# Altium PCB MB1134.PcbDoc (part 2 of 2)
Units mm, origin at the board's own origin, x right, y up, seen from the top; angles counter-clockwise.
Board outline 53.34 x 88.9 mm, 2 copper layers (Top Layer, Bottom Layer), stack 1.571 mm thick; 105 components, 124 nets, 401 pads, 201 vias.
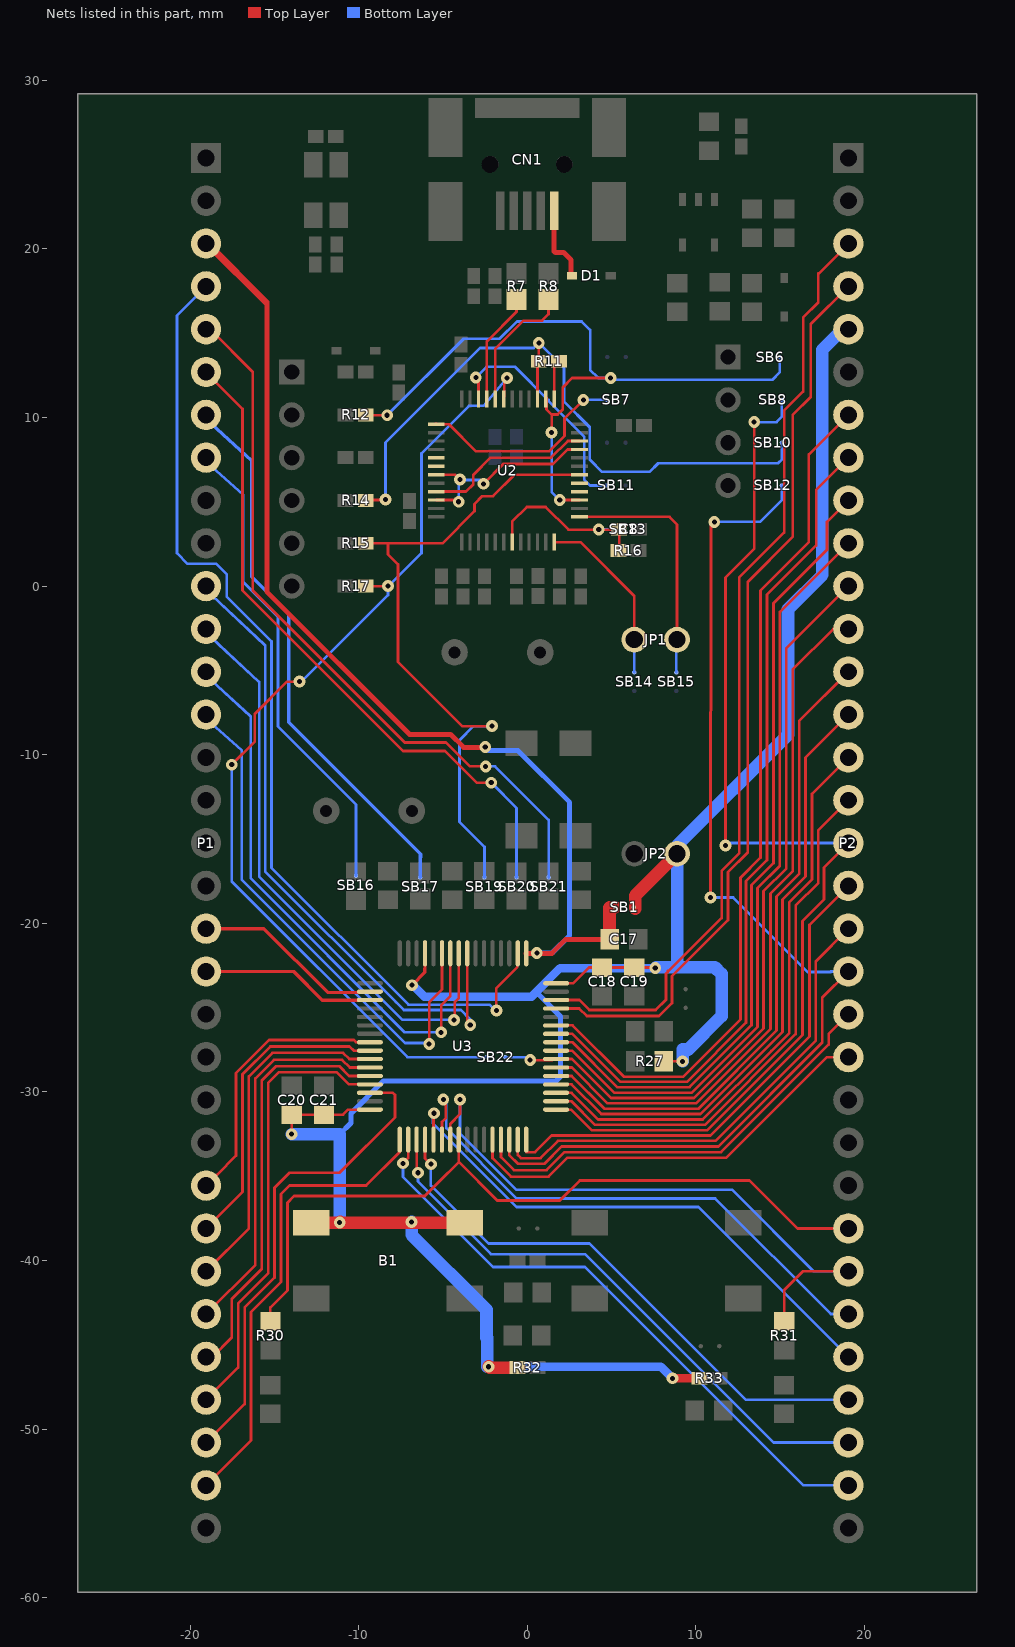
[diagram p2: the nets of this part, all layers, seen from the top]

## Via types
v1: diameter 0.7, hole 0.3, Top Layer to Bottom Layer, 200 vias
v2: diameter 0.6, hole 0.3, Top Layer to Bottom Layer, 1 vias

## Nets (pads, with @x,y where several pads share a name; then routed paths per layer and width w, separated by ;. In a path a pad name is that pad's centre, name@x,y a point inside that pad or via, vN(x,y) a via of type N, cw(c..) or ccw(c..) an arc to the next point about the centre after c; other vN are vias at no path point) (continued)
PA11: P2.22 U3.44 | length 25.6
  Top Layer w0.16: U3.44@-2.06,-32.83 -2.06,-33.932 -0.965,-35.027 1.27,-35.027 2.392,-33.905 11.811,-33.905 17.776,-27.94 P2.22@19.05,-27.94
PA12: P2.21 U3.45 | length 26.2
  Top Layer w0.16: U3.45@-1.56,-32.83 -1.56,-33.873 -0.787,-34.646 1.143,-34.646 2.21,-33.579 11.506,-33.579 17.882,-27.203 17.882,-26.568 P2.21@19.05,-25.4
PA13: P2.20 SB12.1 U3.46 | length 65.3
  Top Layer w0.16: U3.46@-1.06,-32.83 -1.06,-33.763 -0.559,-34.265 1.016,-34.265 2.045,-33.236 11.341,-33.236 17.501,-27.076 17.501,-24.409 P2.20@19.05,-22.86 ; v1(10.871,-18.466) 10.897,3.607 v1(11.1,3.81)
  Bottom Layer w0.16: v1(10.871,-18.466) 12.217,-18.466 16.637,-22.885 18.009,-22.885 ; v1(11.1,3.81) 13.818,3.81 15.105,5.097 SB12.1@15.105,5.969 ; 18.009,-22.86 P2.20@19.05,-22.86
PA14: P2.17 SB8.1 U3.49 | length 66
  Top Layer w0.16: U3.49@1.715,-31.055 2.607,-31.055 3.822,-32.27 10.687,-32.27 16.332,-26.626 16.332,-19.863 17.602,-18.593 17.602,-16.688 P2.17@19.05,-15.24 ; v1(11.76,-15.392) 11.76,0.508 13.462,2.21 v1(13.462,9.728)
  Bottom Layer w0.16: v1(11.76,-15.392) 11.913,-15.24 P2.17@19.05,-15.24 ; v1@13.462,9.652 v1(13.462,9.728) 14.783,9.728 15.105,10.05 SB8.1@15.105,11.049
PA15: P2.16 U3.50 | length 32.2
  Top Layer w0.16: U3.50@1.715,-30.555 2.615,-30.555 4.013,-31.953 10.552,-31.953 15.926,-26.58 15.926,-18.948 17.272,-17.602 17.272,-14.478 P2.16@19.05,-12.7
PB0: P1.27 U3.26 | length 20.5
  Top Layer w0.16: P1.27@-19.05,-40.64 -16.51,-38.1 -16.51,-29.083 -15.113,-27.686 -10.922,-27.686 -10.553,-28.055 U3.26@-9.335,-28.055
PB1: P1.28 U3.27 | length 22.6
  Top Layer w0.16: P1.28@-19.05,-43.18 -16.129,-40.259 -16.129,-29.21 -15.019,-28.1 -10.979,-28.1 -10.524,-28.555 U3.27@-9.335,-28.555
PB2: P1.29 U3.28 | length 25
  Top Layer w0.16: P1.29@-19.05,-45.72 -18.669,-45.72 -17.526,-44.577 -17.526,-42.291 -15.748,-40.513 -15.748,-29.337 -14.891,-28.48 -11.144,-28.48 -10.569,-29.055 U3.28@-9.335,-29.055
PB3: P2.11 SB22.2 U3.55 | length 46.1
  Top Layer w0.16: v1(0.178,-28.118) U3.55@1.473,-28.118 ; U3.55@1.715,-28.055 2.655,-28.055 4.965,-30.365 9.894,-30.365 14.021,-26.238 14.021,-18.085 15.367,-16.739 15.367,-3.683 P2.11@19.05,0
  Bottom Layer w0.16: SB22.2@-1.305,-27.94 0,-27.94 v1(0.178,-28.118)
PB4: P2.10 U3.56 | length 45.5
  Top Layer w0.16: U3.56@1.715,-27.555 2.663,-27.555 5.156,-30.048 9.765,-30.048 13.665,-26.148 13.665,-17.907 14.986,-16.586 14.986,-1.524 P2.10@19.05,2.54
PB5: P2.9 U3.57 | length 47.7
  Top Layer w0.16: U3.57@1.715,-27.055 2.671,-27.055 5.334,-29.718 9.636,-29.718 13.31,-26.045 13.31,-17.729 14.605,-16.434 14.605,-1.016 17.78,2.159 17.78,3.81 P2.9@19.05,5.08
PB6: P2.8 U3.58 | length 49.9
  Top Layer w0.16: U3.58@1.715,-26.555 2.679,-26.555 5.531,-29.407 9.468,-29.407 12.978,-25.896 12.978,-17.502 14.224,-16.256 14.224,-0.508 17.139,2.407 17.139,5.709 P2.8@19.05,7.62
PB7: P2.7 U3.59 | length 52.1
  Top Layer w0.16: U3.59@1.715,-26.055 2.687,-26.055 5.727,-29.095 9.259,-29.095 12.649,-25.705 12.649,-17.297 13.843,-16.104 13.843,-0.254 16.707,2.61 16.707,7.817 P2.7@19.05,10.16
PB8: P2.4 U3.61 | length 54.2
  Top Layer w0.16: U3.61@1.715,-25.055 3.084,-25.055 3.534,-25.505 7.82,-25.505 8.585,-24.74 8.585,-23.139 11.913,-19.812 11.913,-16.967 13.081,-15.799 13.081,0.254 15.748,2.921 15.748,10.16 16.818,11.23 16.818,15.548 P2.4@19.05,17.78
PB9: P2.3 U3.62 | length 56.5
  Top Layer w0.16: U3.62@1.715,-24.555 3.092,-24.555 3.683,-25.146 7.62,-25.146 8.23,-24.536 8.23,-22.987 8.331,-22.885 ; 8.331,-22.809 8.331,-22.885 ; 17.272,18.542 17.272,18.517 ; P2.3@19.05,20.32 19.05,20.295 17.272,18.517 ; 8.331,-22.885 11.532,-19.685 11.532,-16.891 12.573,-15.85 12.573,0.508 15.24,3.175 15.24,10.414 16.366,11.54 16.366,15.934 17.272,16.84 17.272,18.517
PB10: P1.30 U3.29 | length 27.8
  Top Layer w0.16: P1.30@-19.304,-48.26 -19.144,-48.383 P1.30@-18.64,-48.769 ; P1.30@-19.05,-48.26 -17.145,-46.355 -17.145,-42.545 -15.367,-40.767 -15.367,-29.464 -14.732,-28.829 -11.303,-28.829 -10.577,-29.555 U3.29@-9.335,-29.555
PB11: P1.31 U3.30 | length 28.5
  Top Layer w0.16: P1.31@-19.05,-50.8 -16.764,-48.514 -16.764,-42.799 -14.986,-41.021 -14.986,-35.687 -14.097,-34.798 -11.125,-34.798 -7.849,-31.521 -7.849,-30.175 -7.969,-30.055 U3.30@-9.335,-30.055
PB12: P1.32 U3.33 | length 27.9
  Top Layer w0.16: P1.32@-19.05,-53.34 -16.383,-50.673 -16.383,-43.053 -14.605,-41.275 -14.605,-36.068 -14.097,-35.56 -9.55,-35.56 -7.56,-33.57 U3.33@-7.56,-32.83
PB13: P2.32 U3.34 | length 36.3
  Top Layer w0.16: v1(-7.366,-34.238) -7.06,-33.932 U3.34@-7.06,-32.83
  Bottom Layer w0.16: v1(-7.366,-34.238) -7.366,-35.052 -2.032,-40.386 3.429,-40.386 16.383,-53.34 P2.32@19.05,-53.34
PB14: P2.31 U3.35 | length 34.5
  Top Layer w0.16: U3.35@-6.56,-32.83 -6.56,-34.715 v1(-6.477,-34.798)
  Bottom Layer w0.16: v1(-6.477,-34.798) -6.477,-35.306 -2.159,-39.624 3.429,-39.624 14.605,-50.8 v1(19.05,-50.8)
PB15: P2.30 U3.36 | length 32.9
  Top Layer w0.16: U3.36@-6.06,-32.83 -6.06,-33.945 v1(-5.715,-34.29)
  Bottom Layer w0.16: v1(-5.715,-34.29) -5.715,-35.56 -2.286,-38.989 3.683,-38.989 12.954,-48.26 P2.30@19.05,-48.26
PC0: P1.11 U3.8 | length 39
  Top Layer w0.16: U3.8@-3.56,-21.78 -3.56,-25.853 v1(-3.378,-26.035)
  Bottom Layer w0.16: P1.11@-19.304,0 -19.168,-0.127 -18.74,-0.526 -15.545,-3.505 -15.545,-16.916 -7.785,-24.676 -7.315,-25.146 -3.937,-25.146 -3.378,-25.705 v1(-3.378,-26.035)
PC1: P1.12 U3.9 | length 35.3
  Top Layer w0.16: v1(-4.343,-25.73) -4.293,-25.679 -4.293,-24.663 -4.06,-24.431 U3.9@-4.06,-21.78
  Bottom Layer w0.16: P1.12@-19.304,-2.54 -19.167,-2.667 -18.736,-3.065 -15.9,-5.69 -15.9,-17.221 -7.391,-25.73 v1(-4.343,-25.73)
PC2: P1.13 U3.10 | length 33.5
  Top Layer w0.16: v1(-5.105,-26.467) -5.105,-24.867 -4.56,-24.321 U3.10@-4.56,-21.78
  Bottom Layer w0.16: P1.13@-19.304,-5.08 -19.165,-5.206 -18.729,-5.605 -16.408,-7.722 -16.408,-17.323 -7.264,-26.467 v1(-5.105,-26.467)
PC3: P1.14 U3.11 | length 31.7
  Top Layer w0.16: v1(-5.817,-27.153) -5.817,-24.689 -5.06,-23.932 U3.11@-5.06,-21.78
  Bottom Layer w0.16: P1.14@-19.304,-7.62 -19.163,-7.746 -18.717,-8.144 -16.942,-9.728 -16.942,-17.399 -7.239,-27.102 -5.867,-27.102 v1(-5.817,-27.153) ; P1.14@-19.05,-7.671 P1.14@-19.05,-7.62
PC4: P1.25 U3.24 | length 16.2
  Top Layer w0.16: P1.25@-19.05,-35.56 -18.412,-34.922 -17.272,-33.782 -17.272,-28.891 -15.305,-26.924 -10.287,-26.924 -10.156,-27.055 U3.24@-9.335,-27.055
PC5: P1.26 U3.25 | length 18.4
  Top Layer w0.16: P1.26@-19.05,-38.1 -16.891,-35.941 -16.891,-28.956 -15.24,-27.305 -10.541,-27.305 -10.291,-27.555 U3.25@-9.335,-27.555
PC6: P2.29 U3.37 | length 32.9
  Top Layer w0.16: U3.37@-5.56,-32.83 -5.56,-31.29 v1(-5.537,-31.267) ; P2.29@19.05,-45.72 P2.29@19.05,-45.288
  Bottom Layer w0.16: v1@-5.588,-31.318 -5.588,-31.877 -0.635,-36.83 10.16,-36.83 P2.29@19.05,-45.72
PC7: P2.28 U3.38 | length 32.7
  Top Layer w0.16: U3.38@-5.06,-32.83 -5.06,-31.781 -4.826,-31.547 -4.826,-30.607 v1(-4.978,-30.455)
  Bottom Layer w0.16: v1(-4.978,-30.455) -4.978,-30.48 -4.801,-30.658 -4.801,-32.156 -0.635,-36.322 11.151,-36.322 18.009,-43.18 P2.28@19.05,-43.18
PC8: P2.27 R31.2 U3.39 | length 37.2
  Top Layer w0.16: U3.39@-4.56,-32.83 -4.56,-31.89 -3.988,-31.318 v1(-3.988,-30.455) ; R31.2@15.245,-43.619 15.245,-41.753 16.358,-40.64 P2.27@19.05,-40.64
  Bottom Layer w0.16: v1(-3.988,-30.455) -3.988,-32.461 -0.635,-35.814 12.167,-35.814 16.993,-40.64 P2.27@19.05,-40.64
PC9: P2.26 R30.2 U3.40 | length 45.7
  Top Layer w0.16: R30.2@-15.235,-43.619 -15.235,-42.794 -14.224,-41.783 -14.224,-36.576 -13.826,-36.178 -6.079,-36.178 -4.699,-34.798 ; -4.695,-34.802 -4.06,-34.167 ; U3.40@-4.06,-32.83 -4.06,-34.167 ; P2.26@19.05,-38.1 16.027,-38.1 13.183,-35.255 3.124,-35.255 1.93,-36.449 -1.778,-36.449 -4.06,-34.167
PC10: P2.15 U3.51 | length 34.4
  Top Layer w0.16: U3.51@1.715,-30.055 2.623,-30.055 4.203,-31.635 10.409,-31.635 14.481,-27.563 15.545,-26.5 15.545,-18.745 16.891,-17.399 16.891,-12.319 P2.15@19.05,-10.16
PC11: P2.14 U3.52 | length 36.6
  Top Layer w0.16: U3.52@1.715,-29.555 2.631,-29.555 4.394,-31.318 10.273,-31.318 15.138,-26.453 15.138,-18.593 16.51,-17.221 16.51,-10.16 P2.14@19.05,-7.62
PC12: P2.13 U3.53 | length 38.8
  Top Layer w0.16: U3.53@1.715,-29.055 2.639,-29.055 4.584,-31 10.148,-31 14.783,-26.365 14.783,-18.415 16.129,-17.069 16.129,-8.001 P2.13@19.05,-5.08
PC13: P1.4 U3.2 | length 59.4
  Top Layer w0.16: v1(-1.829,-25.171) -1.829,-23.851 -0.584,-22.606 -0.584,-21.78 U3.2@-0.584,-21.666
  Bottom Layer w0.16: P1.4@-19.05,17.78 -20.777,16.053 -20.777,1.956 -20.142,1.321 -18.44,1.321 -17.831,0.711 -17.831,-0.61 -15.164,-3.277 -15.164,-16.713 -7.049,-24.828 -2.248,-24.828 -1.905,-25.171 v1(-1.829,-25.171)
PC14: P1.5 SB21.1 | length 43.4
  Top Layer w0.16: P1.5@-19.05,15.24 -18.821,15.24 -16.281,12.7 -16.281,-0.254 -7.264,-9.271 -4.826,-9.271 -3.404,-10.693 v1(-2.464,-10.693)
  Bottom Layer w0.16: v1(-2.464,-10.693) -1.905,-10.693 1.27,-13.868 SB21.1@1.27,-17.28
PC15: P1.6 SB20.1 | length 39.6
  Top Layer w0.16: P1.6@-19.05,12.7 -19.05,12.675 -16.891,10.516 -16.891,-0.254 -7.366,-9.779 -4.877,-9.779 -2.997,-11.659 v1(-2.134,-11.659)
  Bottom Layer w0.16: v1(-2.134,-11.659) -0.635,-13.157 SB20.1@-0.635,-17.28
PD2: P2.12 U3.54 | length 41.6
  Top Layer w0.16: U3.54@1.715,-28.555 2.647,-28.555 4.775,-30.683 10.019,-30.683 14.427,-26.275 14.427,-18.237 15.748,-16.916 15.748,-4.953 18.161,-2.54 P2.12@19.05,-2.54
PF0: P1.7 SB17.1 | length 33.1
  Bottom Layer w0.2: P1.7@-19.304,10.16 -19.166,10.034 -18.73,9.635 -16.332,7.442 -16.332,0.559 -14.148,-1.626 -14.148,-8.077 -6.35,-15.875 ; SB17.1@-6.35,-17.28 -6.35,-15.875 ; -6.299,-16.078 -6.299,-15.926 -6.35,-15.875
PF1: P1.8 SB16.2 | length 28.7
  Bottom Layer w0.16: P1.8@-19.304,7.62 -19.163,7.494 -18.72,7.096 -16.84,5.41 -16.84,0.229 -14.783,-1.829 -14.783,-8.331 -10.16,-12.954 SB16.2@-10.16,-17.18
PF4: P1.19 U3.18 | length 11.2
  Top Layer w0.2: P1.19@-19.304,-20.32 P1.19@-19.05,-20.32 -15.621,-20.32 -11.836,-24.105 U3.18@-9.627,-24.105
PF5: P1.20 U3.19 | length 10.7
  Top Layer w0.2: P1.20@-19.304,-22.86 P1.20@-19.05,-22.86 -13.843,-22.86 -12.148,-24.555 U3.19@-9.335,-24.555
PF6: P2.19 U3.47 | length 29
  Top Layer w0.16: U3.47@-0.56,-32.83 -0.56,-33.755 -0.381,-33.934 0.787,-33.934 1.816,-32.905 11.164,-32.905 17.12,-26.949 17.12,-22.25 P2.19@19.05,-20.32
PF7: P2.18 U3.48 | length 30.3
  Top Layer w0.16: U3.48@-0.06,-32.83 -0.06,-33.57 -0.051,-33.579 0.457,-33.579 1.448,-32.588 10.871,-32.588 15.596,-27.863 16.739,-26.721 16.739,-20.091 P2.18@19.05,-17.78
STLINK_RX: JP1.1 SB15.2 U2.13 | length 14.8
  Top Layer w0.16: U2.13@3.107,4.108 8.44,4.108 8.89,3.658 JP1.1@8.89,-3.175
  Bottom Layer w0.16: SB15.2@8.846,-5.115 8.846,-3.219 JP1.1@8.89,-3.175
STLINK_TX: JP1.2 SB14.2 U2.12 | length 10.6
  Top Layer w0.16: U2.12@1.607,2.608 3.158,2.608 6.35,-0.584 JP1.2@6.35,-3.175
  Bottom Layer w0.16: SB14.2@6.35,-5.115 JP1.2@6.35,-3.175
STM_JTCK: SB7.2 U2.37 | length 12.7
  Top Layer w0.16: U2.37@-5.436,9.627 -5.393,9.627 -5.374,9.627 U2.37@-5.393,9.608 -4.655,9.608 -3.04,7.993 1.287,7.993 2.21,8.915 2.21,9.931 v1(3.327,11.049)
  Bottom Layer w0.16: v1(3.327,11.049) SB7.2@4.734,11.049
STM_JTMS: SB11.2 U2.34 | length 13.8
  Top Layer w0.16: v1(-3.048,12.37) -2.893,12.215 U2.34@-2.893,11.108
  Bottom Layer w0.16: v1(-3.048,12.37) -2.413,13.005 -0.712,13.005 1.27,11.024 ; 1.27,11.049 1.27,11.024 ; SB11.2@4.734,5.969 3.734,5.969 3.378,6.325 3.378,8.865 1.27,10.973 1.27,11.024
STM_RST: C8.2 R16.1 SB13.2 U2.7 | length 11
  Top Layer w0.16: U2.7@-0.893,2.608 -0.893,3.831 -0.025,4.699 1.092,4.699 2.438,3.353 v1(4.242,3.353) 5.436,3.353 C8.2@5.461,3.353 ; C8.2@5.436,3.378 C8.2@5.461,3.353 ; R16.1@5.461,2.083 5.461,2.108 C8.2@5.461,3.353
  Bottom Layer w0.16: v1@4.267,3.378 SB13.2@5.42,3.378
SWIM: U2.22 U2.45 | length 10.1
  Top Layer w0.16: U2.45@-5.393,5.608 -3.632,5.608 -3.2,6.04 -3.2,6.604 -2.184,7.62 1.422,7.62 2.41,8.608 U2.22@3.107,8.608
SWIM_IN: U2.21 U2.43 U2.46 | length 12.6
  Top Layer w0.16: U2.46@-5.393,5.108 -4.092,5.108 -4.092,5.004 -4.092,4.879 v1(-4.064,5.004) ; U2.43@-5.393,6.608 U2.43@-5.385,6.608 ; U2.43@-5.385,6.604 -4.267,6.604 v1(-3.988,6.325) ; v1(-2.591,6.071) -1.422,7.239 1.524,7.239 2.393,8.108 U2.21@3.107,8.108
  Bottom Layer w0.16: v1(-4.064,5.004) -4.064,6.248 v1(-3.988,6.325) -3.785,6.299 -2.819,6.299 v1(-2.591,6.071)
SWIM_RST: U2.42
SWIM_RST_IN: U2.41
T_JTCK: R12.2 SB6.1 U2.15 U2.26 | length 43.6
  Top Layer w0.16: R12.2@-9.576,10.135 v1(-8.306,10.135) ; U2.26@1.107,11.108 U2.26@1.143,11.12 ; U2.26@1.143,11.176 U2.26@1.143,11.12 ; U2.26@1.159,11.125 U2.26@1.143,11.12 ; v1(1.448,9.119) 1.448,10.185 ; v1(1.93,5.105) U2.15@3.099,5.105 ; U2.15@3.048,5.107 3.099,5.107 U2.15@3.107,5.107 ; v1(4.953,12.344) 2.667,12.344 2.108,11.786 2.108,10.49 1.803,10.185 1.448,10.185 ; U2.26@1.143,11.12 1.143,11.108 1.143,10.49 1.448,10.185
  Bottom Layer w0.16: v1(-8.306,10.135) -3.765,14.675 -1.632,14.675 -0.61,15.697 3.226,15.697 3.734,15.189 3.734,12.827 4.191,12.37 4.216,12.37 ; v1(1.448,9.119) 1.448,5.588 v1(1.93,5.105) ; 4.216,12.344 v1(4.953,12.344) 5.055,12.243 14.538,12.243 14.978,12.683 SB6.1@14.978,13.589
T_JTDI: U2.17
T_JTDO: U2.16
T_JTMS: R11.2 R14.2 SB10.1 U2.27 | length 41.3
  Top Layer w0.16: R14.2@-9.652,5.105 -9.576,5.105 v1@-8.433,5.105 ; U2.27@0.607,11.108 0.607,11.885 ; U2.27@0.61,11.125 R11.2@0.61,13.259 ; R11.2@0.686,13.335 v1(0.686,14.427)
  Bottom Layer w0.16: v1(-8.407,5.131) -8.407,8.509 -2.794,14.122 0.381,14.122 v1(0.686,14.427) 2.184,12.929 2.184,10.947 3.708,9.423 3.708,7.518 4.445,6.782 7.264,6.782 7.772,7.29 14.884,7.29 15.105,7.51 SB10.1@15.105,8.509
T_NRST: R15.2 SB19.1 U2.18 | length 40.1
  Top Layer w0.16: R15.2@-9.576,2.54 -8.255,2.54 ; v1(-2.083,-8.306) -3.861,-8.306 -4.54,-7.626 -7.33,-4.837 -7.671,-4.496 -7.671,1.295 -8.255,1.88 -8.255,2.54 ; U2.18@3.107,6.608 -0.758,6.608 -2.032,5.334 -2.667,5.334 -3.124,4.877 -3.124,4.445 -5.029,2.54 -8.255,2.54
  Bottom Layer w0.16: SB19.1@-2.54,-17.28 -2.54,-15.469 -4.013,-13.995 -4.013,-9.144 -3.175,-8.306 v1(-2.083,-8.306)
T_SWDIO_IN: R11.1 U2.25 | length 2.4
  Top Layer w0.16: R11.1@1.575,13.03 R11.1@1.607,13.062 ; U2.25@1.607,11.108 R11.1@1.607,13.062 ; R11.1@1.88,13.335 R11.1@1.607,13.062
T_SWO: R17.2 SB22.1 U2.31 | length 59.5
  Top Layer w0.16: v1(-17.526,-10.592) -16.154,-9.22 -16.154,-7.569 -14.249,-5.664 v1(-13.513,-5.664) ; R17.2@-9.576,0 v1(-8.255,0) ; U2.31@-1.372,11.227 -1.372,12.167 v1(-1.194,12.344)
  Bottom Layer w0.16: v1(-17.526,-10.592) -17.526,-17.526 -7.112,-27.94 SB22.1@-2.405,-27.94 ; v1(-13.513,-5.664) -13.386,-5.664 -8.255,-0.533 v1@-8.255,-0.025 ; v1@-8.23,0 -6.274,1.956 -6.274,7.874 -3.454,10.693 -2.591,10.693 v1(-1.194,12.344)
U5V: CN1.1 D1.1 | length 3.7
  Top Layer w0.3: CN1.1@1.6,21.36 1.6,19.863 1.676,19.787 2.159,19.787 2.591,19.355 2.591,18.415 D1.1@2.591,18.364
USB_DM: R8.2 U2.32 | length 7.8
  Top Layer w0.16: U2.32@-1.893,11.108 -1.893,14.085 -1.253,14.725 -0.23,15.748 0.884,15.748 1.265,16.129 R8.2@1.265,16.949
USB_DP: R7.2 U2.33 | length 6.6
  Top Layer w0.16: U2.33@-2.393,11.108 -2.393,14.523 -0.64,16.276 R7.2@-0.64,16.949
VBAT: C17.2 P1.3 SB1.1 U3.1 | length 68.3
  Top Layer w0.3: v1(-2.489,-9.55) -2.489,-9.576 -2.502,-9.563 -3.772,-9.563 -4.547,-8.788 -6.985,-8.788 -15.443,-0.33 -15.443,16.713 ; U3.1@-0.06,-21.78 v1@0.559,-21.78 ; v1(0.571,-21.768) v1@0.559,-21.78 ; C17.2@4.884,-20.95 2.286,-20.95 2.286,-20.955 1.461,-21.78 0.571,-21.78 v1@0.559,-21.78 ; -15.443,16.713 P1.3@-19.05,20.32 -18.898,20.32 -15.443,16.866 -15.443,16.713
  Top Layer w0.75: C17.2@4.884,-20.95 4.884,-19.069 4.902,-19.05 SB1.1@5.215,-19.05
  Bottom Layer w0.3: v1(-2.489,-9.55) -2.286,-9.754 -0.559,-9.754 2.515,-12.827 2.515,-20.726 1.473,-21.768 v1(0.571,-21.768)
VDD: B1.1 B1.2 C18.1 C19.1 C20.1 C21.1 JP2.2 P2.5 R27.1 R32.2 R33.2 SB1.2 U3.13 U3.32 U3.64 | length 150.3
  Top Layer w0.16: v1(-13.97,-32.512) C20.1@-13.965,-31.349 -10.927,-31.349 -10.633,-31.055 U3.32@-9.335,-31.055 ; U3.64@1.715,-23.555 2.734,-23.555 3.663,-22.626 v1@7.564,-22.626 ; R27.1@8.108,-28.189 v1(9.215,-28.189)
  Top Layer w0.2: v1(-6.833,-23.673) -6.071,-22.911 -6.071,-22.708 ; -6.06,-22.708 U3.13@-6.06,-21.78
  Top Layer w0.5: v1(8.611,-46.99) R33.2@10.211,-46.99
  Top Layer w0.75: B1.1@-12.667,-37.617 B1.1@-12.805,-37.755 B1.2@-3.705,-37.755 B1.2@-3.843,-37.617 ; v1@-11.136,-37.755 v1@-11.1,-37.719 ; v1@-11.135,-37.744 v1(-11.125,-37.744) ; v1@-2.273,-46.291 -2.21,-46.355 R32.2@-0.584,-46.355 ; SB1.2@6.401,-19.126 6.401,-18.364 JP2.2@8.89,-15.875
  Bottom Layer w0.305: -11.125,-32.512 -10.454,-31.84 -10.454,-31.282 -8.534,-29.362 1.702,-29.362 1.981,-29.083 1.981,-25.527 0.533,-24.079
  Bottom Layer w0.5: v1@-6.782,-23.673 -6.109,-24.346 0.267,-24.346 1.956,-22.657 v1(7.595,-22.657) ; v1(-2.286,-46.304) 7.925,-46.304 v1(8.611,-46.99)
  Bottom Layer w0.75: v1(-13.97,-32.512) -11.125,-32.512 v1(-11.125,-37.744) ; v1(-6.858,-37.719) -6.858,-38.481 -2.413,-42.926 -2.413,-44.577 ; v1@-2.362,-46.304 -2.362,-44.577 ; v1@7.645,-22.606 8.707,-22.606 8.89,-22.423 ; JP2.2@8.89,-15.875 8.89,-22.606 11.125,-22.606 11.532,-23.012 11.532,-25.502 9.55,-27.483 9.22,-27.483 ; JP2.2@8.89,-15.392 15.469,-8.814 15.469,-1.372 17.505,0.665 17.505,14.025 18.72,15.24 P2.5@19.05,15.24 ; v1(9.215,-28.189) 9.215,-27.483
pads on no net: CN1.6 CN1.7 U2.4 U2.11 U2.14 U2.19 U2.28 U2.38 U2.39 U2.40 X3.2 X3.3

## Polygon pours and split planes (outlines as drawn)
GND on Top Layer "GND" (solid, remove dead copper, pour order 1000): -25.908,-58.928 25.908,-58.928 25.908,28.448 -25.908,28.448
GND on Bottom Layer "GND" (solid, remove dead copper, pour order 1001): -25.908,28.448 25.908,28.448 25.908,-58.928 -25.908,-58.928

## Other copper
Top Layer:
  text ".Layer_Name" at -58.6,-144.2 h7
Bottom Layer:
  text ".Layer_Name" at -58.6,-144.2 h7

## Silkscreen, mask and mechanical layers (free items; w line width, h text height)
Top Overlay:
  drawing of 244 lines, arcs and shapes, not listed
  text "PWR" at 6.985,26.162 h1
  text "3V" at -24.384,24.892 h1
  text "5V" at 20.955,24.892 h1
  text "COM" at -17.018,23.114 h1
  text "GND" at 20.955,22.428 h1
  text "GND" at -24.384,22.352 h1
  text "PB9" at 20.955,19.888 h1
  text "VDD" at -24.384,19.812 h1
  text "PB8" at 20.955,17.348 h1
  text "PC13" at -24.384,17.272 h1
  text "VDD" at 20.955,14.808 h1
  text "PC14" at -24.384,14.732 h1
  text "BOOT0" at 20.955,12.268 h1
  text "PC15" at -24.384,12.192 h1
  text "PB7" at 20.955,9.728 h1
  text "PF0" at -24.384,9.652 h1
  text "PB6" at 20.955,7.188 h1
  text "PF1" at -24.384,7.112 h1
  text "ST-LINK" at 8.89,6.604 h1.2 r90
  text "DISCOVERY" at 17.018,5.842 h1.2 r90
  text "PB5" at 20.955,4.648 h1
  text "GND" at -24.384,4.572 h1
  text "SWD" at -15.748,4.318 h1.5 r90
  text "PB4" at 20.955,2.108 h1
  text "NRST" at -24.384,2.032 h1
  text "PB3" at 20.955,-0.432 h1
  text "PC0" at -24.384,-0.508 h1
  text "PD2" at 20.955,-2.972 h1
  text "PC1" at -24.384,-3.048 h1
  text "PC12" at 20.955,-5.512 h1
  text "PC2" at -24.384,-5.588 h1
  text "TX" at 5.588,-5.842 h1
  text "RX" at 8.128,-5.842 h1
  text "www.st.com/stm32f0-discovery" at -15.545,-7.62 h1.5
  text "PC11" at 20.955,-8.052 h1
  text "PC3" at -24.384,-8.128 h1
  text "PC10" at 20.955,-10.592 h1
  text "PA0" at -24.384,-10.668 h1
  text "PA15" at 20.955,-13.132 h1
  text "PA1" at -24.384,-13.208 h1
  text "Idd" at 6.858,-13.97 h1
  text "PA14" at 20.955,-15.672 h1
  text "PA2" at -24.384,-15.748 h1
  text "PF7" at 20.955,-18.212 h1
  text "PA3" at -24.384,-18.288 h1
  text "PF6" at 20.955,-20.752 h1
  text "PF4" at -24.384,-20.828 h1
  text "PA13" at 20.955,-23.292 h1
  text "PF5" at -24.384,-23.368 h1
  text "PA12" at 20.955,-25.832 h1
  text "PA4" at -24.384,-25.908 h1
  text "PA11" at 20.955,-28.372 h1
  text "PA5" at -24.384,-28.448 h1
  text "PA10" at 20.955,-30.912 h1
  text "PA6" at -24.384,-30.988 h1
  text "PA9" at 20.955,-33.452 h1
  text "PA7" at -24.384,-33.528 h1
  text "PA8" at 20.955,-35.992 h1
  text "PC4" at -24.384,-36.068 h1
  text "PC9" at 20.955,-38.532 h1
  text "PC5" at -24.384,-38.608 h1
  text "PC8" at 20.955,-41.072 h1
  text "PB0" at -24.384,-41.148 h1
  text "PC7" at 20.955,-43.612 h1
  text "PB1" at -24.384,-43.688 h1
  text "USER" at -11.176,-45.466 h1.5
  text "RESET" at 3.175,-45.593 h1.5
  text "PC6" at 20.955,-46.152 h1
  text "PB2" at -24.384,-46.228 h1
  text "PB10" at -24.384,-48.768 h1
  text "PB15" at 20.955,-48.768 h1
  text "PB11" at -24.384,-51.308 h1
  text "PC9" at -16.637,-51.308 h1
  text "PB14" at 20.955,-51.308 h1
  text "PC8" at 13.843,-51.562 h1
  text "PB12" at -24.384,-53.848 h1
  text "PB13" at 20.955,-53.848 h1
  text "MB1134 rev A" at -1.27,-54.61 h1.5
  text "GND" at -24.384,-56.388 h1
  text "GND" at 20.955,-56.388 h1
  text "STM32F0308-DISCO" at -3.81,-57.15 h1.5
  text ".Layer_Name" at -58.6,-144.2 h7
Bottom Overlay:
  circle w0.2: c3.251,-42.634 r2.881
  circle w0.2: c-7.984,-42.68 r2.867
  lines w0.2: -2.95,-36.654 17.05,-36.654 17.05,-30.654 -2.95,-30.654 -2.95,-36.654
  lines w0.254: 7.212,4.218 7.366,4.318 ; 7.212,14.378 7.366,14.478 ; 7.366,4.318 3.556,4.318 3.556,14.478 7.366,14.478 ; 7.366,4.318 7.366,14.478 ; 12.954,3.81 12.954,14.478 16.002,14.478 16.002,3.81 12.954,3.81
  lines w0.508: -9.585,-41.436 cw(c-9.47,-42.591) -9.583,-43.747 ; -9.406,-42.502 -8.517,-42.502 ; -7.586,-43.723 ccw(c-7.472,-42.567) -7.586,-41.411
  text "DEFAULT" at 16.332,6.096 h1.2 r270
  text "RESERVED" at 1.778,5.588 h1.3 r270
  text "SN" at 6.096,-34.29 h1.27
  text "RoHS" at 5.78,-43.217 h1.4
  text ".Layer_Name" at 46.101,-144.145 h7
Top Paste:
  text ".Layer_Name" at -57.6,-143.5 h7
Bottom Paste:
  text ".Layer_Name" at -57.6,-143.5 h7
Top Solder:
  text ".Layer_Name" at -57.6,-143.5 h7
Bottom Solder:
  text ".Layer_Name" at -57.6,-143.5 h7
CONTOUR:
  the board outline again, w0.15
  text "MB1134" at -25.4,30.988 h1.52
CARTOUCHE FT:
  lines w0.203: -59.17,-166.88 50.05,-166.88 ; -59.17,-157.99 50.05,-157.99
  lines w0.508: -96,-174.5 -96,-133.86 94.5,-133.86 ; -93.46,-159.26 -62.98,-159.26 ; -93.46,-147.83 -62.98,-147.83 ; -105.5,-174.5 94.5,-174.5 94.5,112.5 -105.5,112.5 -105.5,-174.5 ; -93.46,-171.96 -62.98,-171.96 -62.98,-136.4 -93.46,-136.4 -93.46,-171.96 ; -60.44,-171.96 51.32,-171.96 51.32,-149.1 -60.44,-149.1 -60.44,-171.96 ; -60.44,-146.56 51.32,-146.56 51.32,-136.4 -60.44,-136.4 -60.44,-146.56 ; 53.86,-171.96 91.96,-171.96 91.96,-136.4 53.86,-136.4 53.86,-171.96
  text "DATE:" at -92.558,-143.863 h4
  text ".Print_Date" at -81.058,-143.863 h4
  text ".Print_Scale" at -92.322,-156.644 h4
  text "STM32F0-DISCOVERY" at -58,-157 h7
  text "MB1134B" at -58,-166 h7
  text "S.M.E.E." at -92.71,-167.894 h7
CARTOUCHE FB (Mech16):
  lines w0.203: -61.05,-166.88 48.17,-166.88 ; -61.05,-157.99 48.17,-157.99
  lines w0.508: -105.5,-133.86 85,-133.86 85,-174.5 ; 51.98,-159.26 82.46,-159.26 ; 51.98,-147.83 82.46,-147.83 ; -105.5,-174.5 -105.5,112.5 94.5,112.5 94.5,-174.5 -105.5,-174.5 ; -102.96,-171.96 -64.86,-171.96 -64.86,-136.4 -102.96,-136.4 -102.96,-171.96 ; -62.32,-171.96 -62.32,-149.1 49.44,-149.1 49.44,-171.96 -62.32,-171.96 ; -62.32,-146.56 -62.32,-136.4 49.44,-136.4 49.44,-146.56 -62.32,-146.56 ; 51.98,-171.96 82.46,-171.96 82.46,-136.4 51.98,-136.4 51.98,-171.96
  text ".Print_Date" at 70.058,-143.863 h4
  text "DATE:" at 81.558,-143.863 h4
  text ".Print_Scale" at 81.322,-156.644 h4
  text "STM32F0-DISCOVERY" at 47,-157 h7
  text "MB1134B" at 47,-166 h7
  text "S.M.E.E." at 81.03,-167.785 h7
Drill Drawing:
  region: -22.207,-90.108 -21.868,-90.108 -21.868,-94.299 -22.207,-94.299
  region: -96.345,-89.431 -95.666,-89.431 -95.666,-129.523 -96.345,-129.523
  region: -44.784,-90.108 -44.444,-90.108 -44.444,-128.846 -44.784,-128.846
  region: -22.207,-98.66 -21.868,-98.66 -21.868,-128.846 -22.207,-128.846
  region: 0.199,-90.108 0.878,-90.108 0.878,-129.523 0.199,-129.523
  region: -95.666,-89.431 0.878,-89.431 0.878,-90.108 -95.666,-90.108
  region: -95.666,-93.961 0.199,-93.961 0.199,-94.299 -95.666,-94.299
  region: -95.666,-98.321 0.199,-98.321 0.199,-98.66 -95.666,-98.66
  region: -95.666,-102.682 0.199,-102.682 0.199,-103.021 -95.666,-103.021
  region: -95.666,-107.043 0.199,-107.043 0.199,-107.381 -95.666,-107.381
  region: -95.666,-111.403 0.199,-111.403 0.199,-111.742 -95.666,-111.742
  region: -95.666,-115.764 0.199,-115.764 0.199,-116.103 -95.666,-116.103
  region: -95.666,-120.125 0.199,-120.125 0.199,-120.463 -95.666,-120.463
  region: -95.666,-124.485 0.199,-124.485 0.199,-124.824 -95.666,-124.824
  region: -95.666,-128.846 0.878,-128.846 0.878,-129.523 -95.666,-129.523
  lines w0.042: -95.666,-124.485 0.199,-124.485 ; -95.666,-120.125 0.199,-120.125 ; -95.666,-115.764 0.199,-115.764 ; -95.666,-111.403 0.199,-111.403 ; -95.666,-107.043 0.199,-107.043 ; -95.666,-102.682 0.199,-102.682 ; -95.666,-98.321 0.199,-98.321 ; -95.666,-93.961 0.199,-93.961 ; -44.784,-128.846 -44.784,-90.108 ; -22.207,-128.846 -22.207,-98.66 ; -22.207,-94.299 -22.207,-90.108
  lines w0.15: 10.033,-101.356 88.138,-101.356 ; 10.033,-98.746 88.138,-98.746 ; 8.509,-122.34 ccw(c9.359,-122.34) 9.359,-123.19 88.812,-123.19 ccw(c88.812,-122.34) 89.662,-122.34 89.662,-91.401 ccw(c88.812,-91.401) 88.812,-90.551 9.359,-90.551 ccw(c9.359,-91.401) 8.509,-91.401 8.509,-122.34
  text ".Legend" at -93.345,46.609 h2.5
  text "F" at -95.326,-93.119 h3.5
  text "i" at -93.167,-93.119 h3.5
  text "c" at -92.405,-93.119 h3.5
  text "h" at -90.627,-93.119 h3.5
  text "e" at -88.679,-93.119 h3.5
  text "T" at -85.758,-93.119 h3.5
  text "e" at -83.557,-93.119 h3.5
  text "c" at -81.609,-93.119 h3.5
  text "h" at -79.831,-93.119 h3.5
  text "n" at -77.884,-93.119 h3.5
  text "i" at -75.936,-93.119 h3.5
  text "q" at -75.174,-93.119 h3.5
  text "u" at -73.227,-93.119 h3.5
  text "e" at -71.279,-93.119 h3.5
  text "c" at -68.358,-93.119 h3.5
  text "u" at -66.58,-93.119 h3.5
  text "i" at -64.632,-93.119 h3.5
  text "v" at -63.87,-93.119 h3.5
  text "r" at -62.134,-93.119 h3.5
  text "e" at -60.949,-93.119 h3.5
  text "Layer Stack Up Detail for: MB1134.PcbDoc" at 10.033,-96.093 h1.9
  text "C" at -95.326,-97.479 h3.5
  text "o" at -92.786,-97.479 h3.5
  text "t" at -90.839,-97.479 h3.5
  text "e" at -89.865,-97.479 h3.5
  text "m" at -86.944,-97.479 h3.5
  text "a" at -83.938,-97.479 h3.5
  text "x" at -81.99,-97.479 h3.5
  text "i" at -80.212,-97.479 h3.5
  text "m" at -79.45,-97.479 h3.5
  text "u" at -76.444,-97.479 h3.5
  text "m" at -74.497,-97.479 h3.5
  text "53.34mm x 88.9mm" at -43.935,-97.479 h3.5
  text "Layer" at 10.033,-99.721 h0.6
  text "Gerber" at 26.746,-99.721 h0.6
  text "Copper" at 35.151,-99.721 h0.6
  text "Dielectric" at 44.537,-99.721 h0.6
  text "Dielectric" at 54.342,-99.721 h0.6
  text "Dielectric" at 66.806,-99.721 h0.6
  text "Dielectric" at 76.611,-99.721 h0.6
  text "Name" at 10.033,-100.921 h0.6
  text "Document" at 26.746,-100.921 h0.6
  text "Thickness" at 35.151,-100.921 h0.6
  text "Height" at 44.537,-100.921 h0.6
  text "Material" at 54.342,-100.921 h0.6
  text "Constant" at 66.806,-100.921 h0.6
  text "Type" at 76.611,-100.921 h0.6
  text "N" at -95.326,-101.84 h3.5
  text "b" at -92.786,-101.84 h3.5
  text "r" at -90.839,-101.84 h3.5
  text "e" at -89.653,-101.84 h3.5
  text "d" at -86.732,-101.84 h3.5
  text "e" at -84.784,-101.84 h3.5
  text "c" at -81.863,-101.84 h3.5
  text "o" at -80.085,-101.84 h3.5
  text "u" at -78.138,-101.84 h3.5
  text "c" at -76.19,-101.84 h3.5
  text "h" at -74.412,-101.84 h3.5
  text "e" at -72.464,-101.84 h3.5
  text "s" at -70.517,-101.84 h3.5
  text "2" at -34.132,-101.84 h3.5
  text "Top Solder Mask" at 10.033,-103.516 h0.85
  text "(.GTS)" at 26.746,-103.516 h0.85
  text "0.0102mm" at 44.537,-103.516 h0.85
  text "Solder Resist" at 54.342,-103.516 h0.85
  text "3.50" at 66.806,-103.516 h0.85
  text "M" at -95.326,-106.201 h3.5
  text "a" at -92.405,-106.201 h3.5
  text "t" at -90.458,-106.201 h3.5
  text "i" at -89.484,-106.201 h3.5
  text "è" at -88.722,-106.201 h3.5
  text "r" at -86.774,-106.201 h3.5
  text "e" at -85.589,-106.201 h3.5
  text "F" at -36.509,-106.201 h3.5
  text "R" at -34.349,-106.201 h3.5
  text "4" at -31.809,-106.201 h3.5
  text "Top Layer" at 10.033,-107.685 h0.85
  text "(.GTL)" at 26.746,-107.685 h0.85
  text "0.0356mm" at 35.151,-107.685 h0.85
  text "1.5mm" at 44.537,-109.77 h0.85
  text "FR-4" at 54.342,-109.77 h0.85
  text "4.80" at 66.806,-109.77 h0.85
  text "Core" at 76.611,-109.77 h0.85
  text "E" at -95.326,-110.562 h3.5
  text "p" at -92.998,-110.562 h3.5
  text "a" at -91.05,-110.562 h3.5
  text "i" at -89.103,-110.562 h3.5
  text "s" at -88.341,-110.562 h3.5
  text "s" at -86.563,-110.562 h3.5
  text "e" at -84.784,-110.562 h3.5
  text "u" at -82.837,-110.562 h3.5
  text "r" at -80.889,-110.562 h3.5
  text "c" at -78.73,-110.562 h3.5
  text "u" at -76.952,-110.562 h3.5
  text "i" at -75.005,-110.562 h3.5
  text "v" at -74.243,-110.562 h3.5
  text "r" at -72.507,-110.562 h3.5
  text "e" at -71.321,-110.562 h3.5
  text "f" at -68.4,-110.562 h3.5
  text "i" at -67.384,-110.562 h3.5
  text "n" at -66.622,-110.562 h3.5
  text "i" at -64.675,-110.562 h3.5
  text "e" at -62.939,-110.562 h3.5
  text "x" at -60.991,-110.562 h3.5
  text "t" at -59.213,-110.562 h3.5
  text "e" at -58.239,-110.562 h3.5
  text "r" at -56.292,-110.562 h3.5
  text "n" at -55.106,-110.562 h3.5
  text "e" at -53.159,-110.562 h3.5
  text "3" at -36.127,-110.562 h3.5
  text "5" at -34.179,-110.562 h3.5
  text "µ" at -32.232,-110.562 h3.5
  text "Bottom Layer" at 10.033,-111.855 h0.85
  text "(.GBL)" at 26.746,-111.855 h0.85
  text "0.0356mm" at 35.151,-111.855 h0.85
  text "V" at -95.326,-114.922 h3.5
  text "e" at -92.998,-114.922 h3.5
  text "r" at -91.05,-114.922 h3.5
  text "n" at -89.865,-114.922 h3.5
  text "i" at -87.917,-114.922 h3.5
  text "s" at -87.155,-114.922 h3.5
  text "é" at -84.403,-114.922 h3.5
  text "p" at -82.456,-114.922 h3.5
  text "a" at -80.508,-114.922 h3.5
  text "r" at -78.561,-114.922 h3.5
  text "g" at -77.376,-114.922 h3.5
  text "n" at -75.428,-114.922 h3.5
  text "e" at -73.481,-114.922 h3.5
  text "2" at -34.132,-114.922 h3.5
  text "Vert" at -13.89,-114.922 h3.5
  text "Bottom Solder Mask" at 10.033,-116.025 h0.85
  text "(.GBS)" at 26.746,-116.025 h0.85
  text "0.0102mm" at 44.537,-116.025 h0.85
  text "Solder Resist" at 54.342,-116.025 h0.85
  text "3.50" at 66.806,-116.025 h0.85
  text "S" at -95.326,-119.283 h3.5
  text "é" at -92.998,-119.283 h3.5
  text "r" at -91.05,-119.283 h3.5
  text "i" at -89.865,-119.283 h3.5
  text "g" at -89.103,-119.283 h3.5
  text "r" at -87.155,-119.283 h3.5
  text "a" at -85.97,-119.283 h3.5
  text "p" at -84.022,-119.283 h3.5
  text "h" at -82.075,-119.283 h3.5
  text "i" at -80.127,-119.283 h3.5
  text "e" at -79.365,-119.283 h3.5
  text "2" at -34.132,-119.283 h3.5
  text "b" at -16.733,-119.283 h3.5
  text "l" at -14.785,-119.283 h3.5
  text "a" at -14.023,-119.283 h3.5
  text "n" at -12.076,-119.283 h3.5
  text "c" at -10.128,-119.283 h3.5
  text "h" at -8.35,-119.283 h3.5
  text "e" at -6.403,-119.283 h3.5
  text "P" at -95.326,-123.644 h3.5
  text "i" at -92.998,-123.644 h3.5
  text "s" at -92.236,-123.644 h3.5
  text "t" at -90.458,-123.644 h3.5
  text "e" at -89.484,-123.644 h3.5
  text "m" at -86.563,-123.644 h3.5
  text "i" at -83.557,-123.644 h3.5
  text "n" at -82.795,-123.644 h3.5
  text "i" at -80.847,-123.644 h3.5
  text "m" at -80.085,-123.644 h3.5
  text "u" at -77.079,-123.644 h3.5
  text "n" at -75.132,-123.644 h3.5
  text "150µ" at -37.103,-123.644 h3.5
  text "I" at -95.326,-127.835 h3.5
  text "s" at -94.353,-127.835 h3.5
  text "o" at -92.574,-127.835 h3.5
  text "l" at -90.627,-127.835 h3.5
  text "e" at -89.865,-127.835 h3.5
  text "m" at -87.917,-127.835 h3.5
  text "e" at -84.911,-127.835 h3.5
  text "n" at -82.964,-127.835 h3.5
  text "t" at -81.016,-127.835 h3.5
  text "m" at -79.069,-127.835 h3.5
  text "i" at -76.063,-127.835 h3.5
  text "n" at -75.301,-127.835 h3.5
  text "i" at -73.354,-127.835 h3.5
  text "m" at -72.591,-127.835 h3.5
  text "u" at -69.586,-127.835 h3.5
  text "m" at -67.638,-127.835 h3.5
  text "150µ" at -37.103,-127.835 h3.5
  text ".Layer_Name" at -57.6,-143.5 h7

## Dimensions
-26.67,29.21 to 26.67,29.21 on Drill Drawing
-26.67,29.21 to -26.67,-59.69 on Drill Drawing